# Altium PCB PCB_IP5358.PcbDoc
Units mil, origin at the board's own origin, x right, y up, seen from the top; angles counter-clockwise.
Board outline 3366.14 x 1003.94 mil, 2 copper layers (Top Layer, Bottom Layer); 48 components, 32 nets, 167 pads, 231 vias.
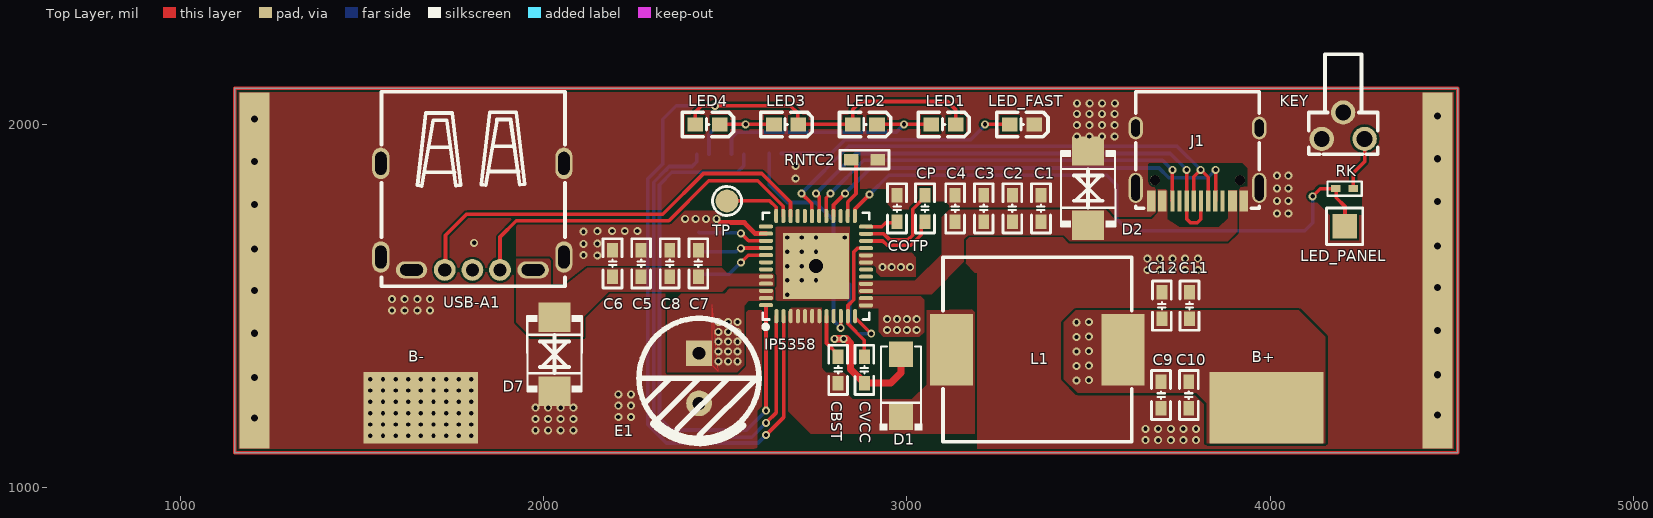
[diagram p0: Top Layer view]
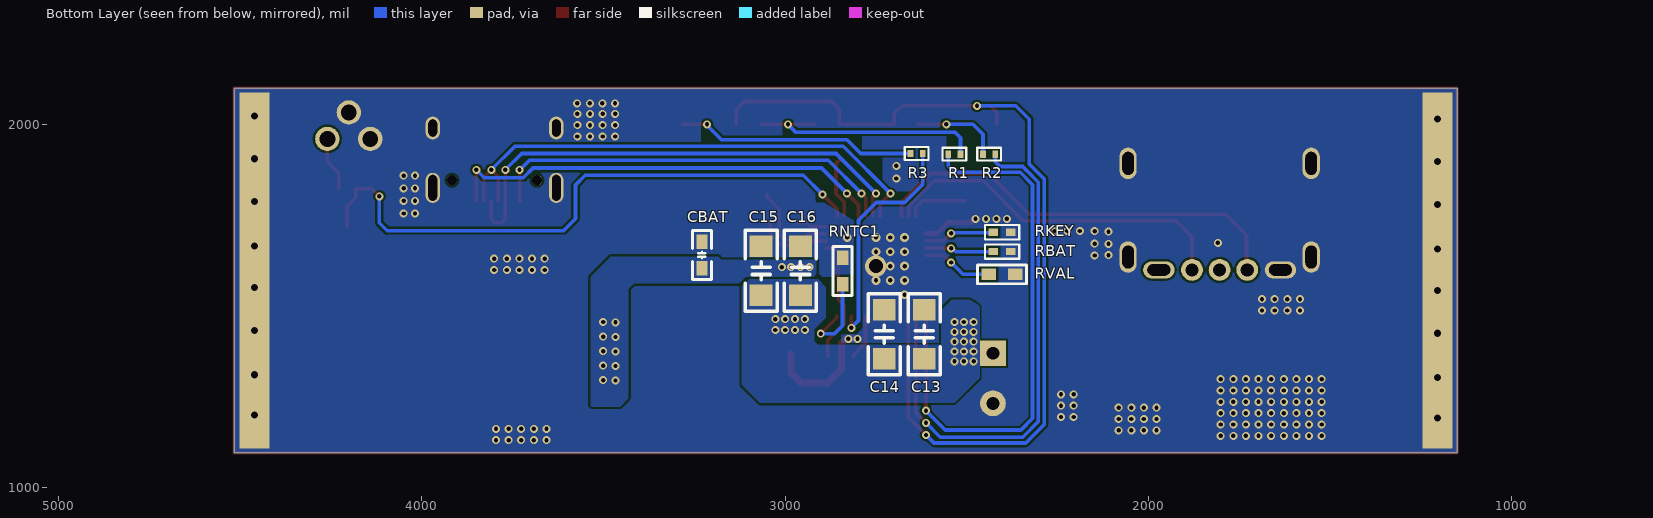
[diagram p1: Bottom Layer view, seen from below]
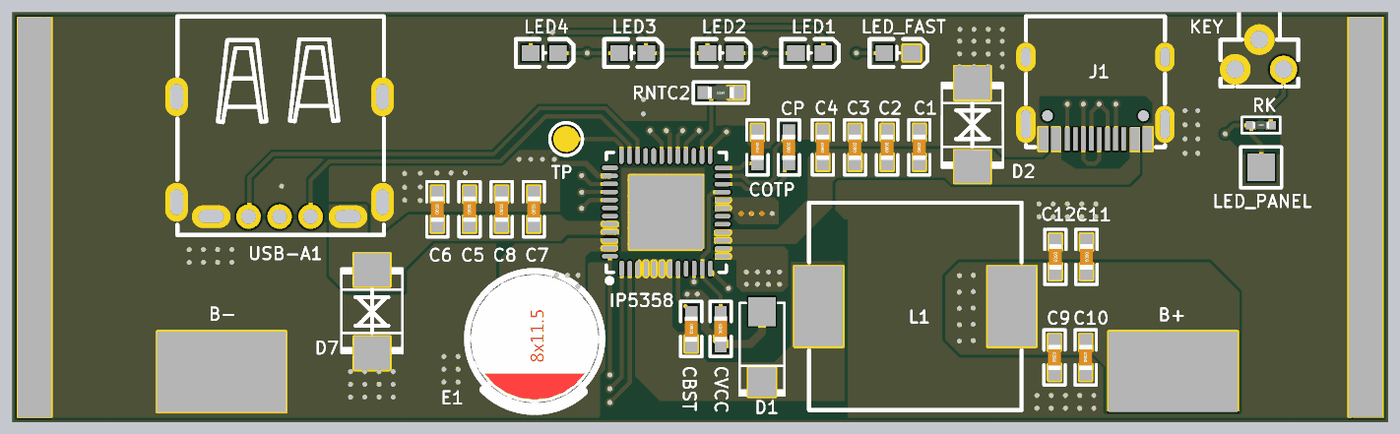
[diagram p2: 3D render of the assembled board from above, using the file's embedded part models]
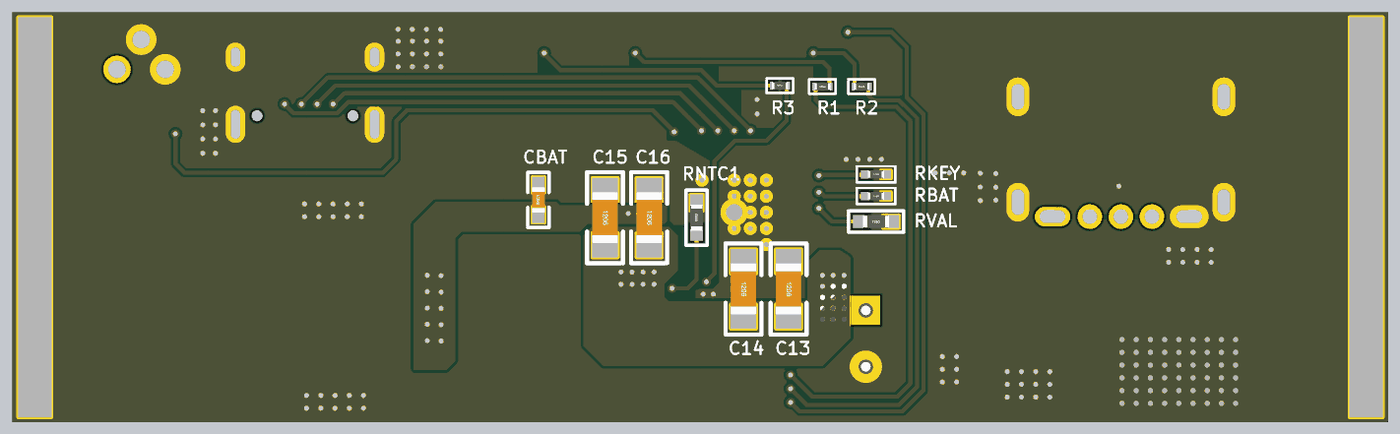
[diagram p3: 3D render of the assembled board from below, using the file's embedded part models]

## Layer stack, top to bottom
Top Solder: solder mask 0.4, Solder Resist, Dk 3.5
Top Layer: signal copper 1.4
Dielectric 1: dielectric 12.6, FR-4, Dk 4.8
Bottom Layer: signal copper 1.4
Bottom Solder: solder mask 0.4, Solder Resist, Dk 3.5

## Board outline
1150,1096.06 4516.14,1096.06 4516.14,2100 1150,2100

## Design rules (kind name [scope] priority, off if disabled: settings)
Clearance [All] p1: gap=6 ignorepadtopadclearanceinfootprint=TRUE except(0: Arc-Hole Track-Hole SMDPad-Hole THPad-Hole Via-Hole Fill-Hole Poly-Hole Region-Hole Text-Hole)
HoleSize [All] p1: absolutevalues=TRUE maxlimit=100 minlimit=12 maxpercent=80.000 minpercent=20.000
HoleToHoleClearance [All] p1: gap=0 allowstackedmicrovias=TRUE
MinimumSolderMaskSliver [All] p1: minsoldermaskwidth=0
PolygonConnect [All] p1: connectstyle=Direct reliefconductorwidth=10 reliefentries=4 polygonreliefangle="90 Angle" airgapwidth=10
RoutingVias [All] p1: holewidth=12 width=20 viastyle="Through Hole" minholewidth=12 minwidth=20 maxholewidth=50 maxwidth=100
SilkToSilkClearance [All] p1: silktosilkclearance=0
SilkToSolderMaskClearance [IsPad] p1: minsilkscreentomaskgap=0 clearancetoexposedcopper=TRUE
SolderMaskExpansion [All] p1: expansion=4
Width [All] p1: maxlimit=300 minlimit=6 preferedwidth=10 minimp=50.000000 maximp=50.000000 favimp=50.000000
25 further rules are at their usual default settings.

## Components (designator, comment, footprint, x,y, rotation, side; value= is the part's Value field where it differs from the comment)
B+ "POWER_PAD" POWER_PAD 3990,1220 r180 top
B- "POWER_PAD" POWER_PAD 1662.16,1220 r180 top
C1 "10uF" C0603_M 3369,1769.13 r90 top
C2 "10uF" C0603_M 3290.33,1769.13 r90 top
C3 "10uF" C0603_M 3211.67,1769.13 r90 top
C4 "10uF" C0603_M 3133,1769.13 r90 top
C5 "10uF" C0603_M 2268.67,1617.7 r90 top
C6 "10uF" C0603_M 2190,1617.7 r90 top
C7 "10uF" C0603_M 2426,1617.7 r90 top
C8 "10uF" C0603_M 2347.33,1617.7 r90 top
C9 "22uF" C0603_M 3699.87,1255 r90 top
C10 "22uF" C0603_M 3776,1255 r90 top
C11 "22uF" C0603_M 3778,1501 r270 top
C12 "22uF" C0603_M 3701.87,1501 r270 top
C13 "22uF" C1206_M 2617,1422.5 r270 bottom
C14 "22uF" C1206_M 2727.35,1422.5 r270 bottom
C15 "22uF" C1206_M 3066,1597 r270 bottom
C16 "22uF" C1206_M 2958,1597 r270 bottom
CBAT "100nF/50V" C0603_M 3229,1640.5 r90 bottom
CBST "100nF/50V" C0603_M 2811,1324.5 r270 top
COTP "2.2uF/16V" C0603_M 2973,1769.13 r270 top
CP "100nF/50V" C0603_M 3050,1769.13 r90 top
CVCC "2.2uF/16V" C0603_M 2883,1324.5 r90 top
D1 "SS34" SS34-SMA 2984,1281.01 r90 top
D2 "SMBJ18CA" TVS 3499,1821.84 r270 top
D7 "SMBJ18CA" TVS 2030,1370 r90 top
E1 "220uF" "CT 3.5*8*11.5 - R" 2428,1301.1 r90 top
IP5358 "IP5358" IP5358 2750,1610 r0 top
J1 "TYPEC-304-BCP16" TYPE-C-16P 3800.43,1939.7 r180 top
KEY "TC-1109DE-C-G" SWITCH 4200.94,1996.42 r180 top
L1 "2.2uH" 2.2uH 3359.22,1380 r0 top
LED1 "25%" 0603LED 3097.12,1999.95 r180 top
LED2 "50%" 0603LED 2880.73,1999.95 r180 top
LED3 "75%" 0603LED 2664.35,1999.95 r180 top
LED4 "100%" 0603LED 2447.96,1999.95 r180 top
LED_FAST "LED_GREEN" 0603LED 3313.5,1999.95 r180 top
LED_PANEL "PZ254V-11-01P" LED 4205,1720 r90 top
R1 "100" R0402_L 2534,1918 r180 bottom
R2 "100" R0402_L 2438.57,1918 r0 bottom
R3 "100" R0402_L 2638.27,1920 r0 bottom
RBAT "1K" R0402_M 2403,1650 r0 bottom
RK "10K" R0402_M 4205,1823.52 r180 top
RKEY "10K" R0402_M 2403,1703 r0 bottom
RNTC1 "51K" R0603_M 2842,1597 r90 bottom
RNTC2 "51K" R0603_M 2883.5,1903 r180 top
RVAL "100K" R0603_M 2403,1587.5 r0 bottom
TP "TEST" "TEST 1.6" 2505,1789.39 r0 top
USB-A1 "U234-051N-3GRA035-5" USB-A-5P 1802.48,1799.51 r180 top

## Footprints (in the part's own frame and the unit in brackets; to place one, negate y for a bottom-side part, rotate by r counter-clockwise, add the part's x,y. Pads: shape width x height; smd on the part's side, far side on the other; paste and mask are expansions set on the pad)
2.2uH [mm] "SMD"
  rect 3x5 smd: 1(-6,0) 2(6,0)
  silkscreen extent -6.6,-6.45 6.6,6.45
0603LED [mil] "0603LED"
  rect 43x39 smd: 1(30,0) 2(-37,0)
  silkscreen extent -75,-34 66,34
C0603_M [mil] "贴片MLCC电容"
  rect 40x30 smd: 1(-36.5,0) 2(36.5,0)
  silkscreen extent -68,-26 68,26, body extent -31,-16 32,16, height 33
C1206_M [mil] "贴片MLCC电容      联系卖家 免费查找封装"
  rect 60x62.99 smd: 1(-67.5,0) 2(67.5,0)
  silkscreen extent -112,-44 112,44, body extent -63,-32 63,32, height 49
"CT 3.5*8*11.5 - R" [mm] "脚距3.5mm , 直径8mm , 高11.5mm"
  rect 1.8x1.8 hole 0.9: 1(1.75,0)
  round 1.8 hole 0.9: 2(-1.75,0)
  silkscreen extent -4.5,-4.2 4.2,4.2, body extent -4,-4 4,4, height 11.55
IP5358 [mm] "IP5358"
  oval 0.28x1 smd: 1(-2.769,-3.5) 2(-2.268,-3.5) 3(-1.768,-3.5) 4(-1.267,-3.5) 5(-0.767,-3.5) 6(-0.267,-3.5) 7(0.231,-3.5) 8(0.732,-3.5) 9(1.232,-3.5) 10(1.732,-3.5) 11(2.233,-3.5) 12(2.733,-3.5) 25(2.718,3.5) 26(2.217,3.5) 27(1.717,3.5) 28(1.217,3.5) 29(0.716,3.5) 30(0.216,3.5) 31(-0.282,3.5) 32(-0.782,3.5) 33(-1.283,3.5) 34(-1.783,3.5) 35(-2.283,3.5) 36(-2.784,3.5)
  oval 1x0.28 smd: 13(3.5,-2.743) 14(3.5,-2.243) 15(3.5,-1.742) 16(3.5,-1.242) 17(3.5,-0.742) 18(3.5,-0.241) 19(3.5,0.257) 20(3.5,0.757) 21(3.5,1.257) 22(3.5,1.758) 23(3.5,2.258) 24(3.5,2.759) 37(-3.5,2.769) 38(-3.5,2.268) 39(-3.5,1.768) 40(-3.5,1.268) 41(-3.5,0.767) 42(-3.5,0.267) 43(-3.5,-0.231) 44(-3.5,-0.731) 45(-3.5,-1.232) 46(-3.5,-1.732) 47(-3.5,-2.232) 48(-3.5,-2.733)
  rect 4.6x4.6 smd: 49(0,0)
  silkscreen extent -3.72,-4.4 3.72,3.73
LED [mm]
  rect 1.7x1.7 smd: 1(0,0)
  silkscreen extent -1.27,-1.27 1.27,1.27
POWER_PAD [mm] "POWER_PAD"
  rect 8x5 smd: 1(0,0)
R0402_L [mm] "1/16W贴片电阻"
  rect 0.4x0.5 smd: 1(-0.425,0) 2(0.425,0)
  silkscreen extent -0.82,-0.45 0.83,0.45, body extent -0.5,-0.25 0.5,0.25, height 0.3
R0402_M [mil] "1/16W贴片电阻"
  rect 26x20 smd: 1(-24,0) 2(24,0)
  silkscreen extent -47,-20 47,20, body extent -20,-10 20,10, height 12
R0603_M [mil] "1/10W贴片电阻"
  rect 40x31.5 smd: 1(-36.5,0) 2(36.5,0)
  silkscreen extent -68,-26 68,26, body extent -31,-16 31,16, height 16
SS34-SMA [mm] "SMA"
  rect 1.8x1.7 smd: 1(-2.192,0) 2(2.192,0)
  silkscreen extent -3.11,-1.48 2.73,1.48
SWITCH [mm]
  round 1.7 hole 1.1: 1(-1.5,0.925) 2(1.5,0.925) 3(0,-0.925)
  silkscreen extent -2.41,-4.99 2.41,2
"TEST 1.6" [mm] "测试点1.6mm"
  round 1.6 smd paste-1.6: 1(0,0)
  silkscreen extent -1.01,-1.02 1.02,1.02
TVS [mil] "SMB(DO-214AA)"
  rect 80.61x88.23 smd: 1(-104.69,0) 2(99.34,0)
  silkscreen extent -108,-75 105,75
TYPE-C-16P [mm] "TYPE-C-16P"
  oval 1x2.099 hole 0.6 slot 1.8 at 90 deg: 13(-4.307,2.903) 14(4.333,2.903)
  oval 1x1.599 hole 0.6 slot 1.2 at 90 deg: 15(-4.307,-1.277) 16(4.333,-1.277)
  rect 0.6x1.45 smd: A1B12(-3.212,3.817) A4B9(-2.437,3.817) B1A12(3.233,3.817) B4A9(2.463,3.817)
  rect 0.3x1.45 smd: A5(-1.238,3.818) A6(-0.237,3.817) A7(0.263,3.817) A8(1.263,3.817) B5(1.763,3.817) B6(0.763,3.817) B7(-0.737,3.817) B8(-1.737,3.817)
  round 0.7 hole 0.7 unplated: ""(-2.967,2.372) ""(2.993,2.372)
  silkscreen extent -4.3,-3.81 4.33,4.32
USB-A-5P [mm] "USB-A-5PIN大电流"
  oval 2.2x1.2 hole 0.8 slot 1.6 at 0 deg: 1(-4.289,5.08) 5(4.211,5.08)
  round 1.524 hole 0.914: 2(-1.969,5.08) 3(-0.039,5.08) 4(1.891,5.08)
  oval 1.2x2.2 hole 0.8 slot 1.6 at 90 deg: 6(-6.439,4.18) 7(6.361,4.18) 8(-6.439,-2.37) 9(6.361,-2.37)
  silkscreen extent -6.52,-7.37 6.31,6.22

## Part data
C1 C2 C3 C4 C5 C6 C7 C8 CBAT CBST COTP CP CVCC: library part C, "10uF(106) ±10% 25V"
C9 C10 C11 C12: library part C, "22uF/10V"
C13 C14 C15 C16: library part C, "22uF/16V"
D1: library part SS34_C408258, BOM_JLCPCB Part Class="Extended Part", BOM_Manufacturer="SLKORMICRO Elec.", BOM_Manufacturer Part=SS34, BOM_Supplier=LCSC, BOM_Supplier Part=C408258, Contributor=LCSC, spicePre=D, spiceSymbolName=SS34_C408258
D2 D7: library part TVS, "18V"
E1: library part CS, "220uF/25V直插固态电容"
J1: "TYPEC-16P"
KEY: BOM_JLCPCB Part Class="Extended Part", BOM_Manufacturer="XKB Enterprise", BOM_Manufacturer Part=TC-1109DE-C-G, BOM_Supplier=LCSC, BOM_Supplier Part=C400325, Contributor=LCSC, spicePre=S, spiceSymbolName=TC-1109DE-C-G
L1: BOM_Manufacturer=YJYCOIN, BOM_Manufacturer Part=YSPI0740-2R2M, BOM_Supplier=LCSC, BOM_Supplier Part=C718393, Contributor=LCSC, nameAlias=Inductance, spicePre=L, spiceSymbolName=YSPI0740-2R2M
LED1 LED2 LED3 LED4: library part LED, "WHITE", LatestRevisionDate=17-Jul-2002, LatestRevisionNote="Re-released for DXP Platform.", PackageDescription="SM LED; 2 Flat Leads", PackageReference=3.2X1.6X1.1, PackageVersion=Feb-2002, Published=8-Jun-2000, Publisher="Altium Limited"
LED_FAST: library part LED, "GREEN", LatestRevisionDate=17-Jul-2002, LatestRevisionNote="Re-released for DXP Platform.", PackageDescription="SM LED; 2 Flat Leads", PackageReference=3.2X1.6X1.1, PackageVersion=Feb-2002, Published=8-Jun-2000, Publisher="Altium Limited"
LED_PANEL: BOM_Manufacturer=XFCN, JLCPCB Part Class="Extended Part", BOM_Manufacturer Part=PZ254V-11-01P, BOM_Supplier=LCSC, BOM_Supplier Part=C492400, Contributor=LCSC, spicePre=H, spiceSymbolName=PZ254V-11-01P
R1 R2 R3 RBAT RK RKEY RNTC1 RNTC2 RVAL: library part R, "贴片电阻"
TP: "测试点"
USB-A1: library part USB-A-5P, BOM_JLCPCB Part Class="Extended Part", BOM_Manufacturer="XKB Enterprise", BOM_Manufacturer Part=U234-051N-3GRA035-5, BOM_Supplier=LCSC, BOM_Supplier Part=C381138, Contributor=LCSC, spicePre=U, spiceSymbolName=U234-051N-3GRA035-5
IP5358: Contributor=Qmery2020_LoveWaiterSeries, spicePre=U, spiceSymbolName=IP5358

## Free pads (board coordinates)
  rect 82x980 smd: 50(1204,1598) 50(4461,1598)
  rect 82x980 smd far side: 50(1204,1598) 50(4461,1598)

## Via types
v1: diameter 22, hole 12, Top Layer to Bottom Layer, tented both sides, 201 vias
v2: diameter 59.06, hole 19.69, Top Layer to Bottom Layer, 16 vias
v3: diameter 24, hole 12, Top Layer to Bottom Layer, 13 vias
v4: diameter 59.06, hole 39.37, Top Layer to Bottom Layer, 1 vias

## Nets (pads, with @x,y where several pads share a name; then routed paths per layer and width w, separated by ;. In a path a pad name is that pad's centre, name@x,y a point inside that pad or via, vN(x,y) a via of type N, cw(c..) or ccw(c..) an arc to the next point about the centre after c; other vN are vias at no path point)
C_IN: C1.1 C2.1 C3.1 C4.1 D2.2 IP5358.15 IP5358.16 J1.A4B9 J1.B4A9
CC1: IP5358.28 J1.A5 | length 1230.7
  Top Layer w10: IP5358.28 2798.1,1748 2798.1,1778.1 v1(2830,1810) ; J1.A5 3850,1790.21 v1(3850,1875)
  Bottom Layer w10: v1(2830,1810) 2900,1880 3694,1880 3721,1853 3828,1853 v1(3850,1875)
CC2: IP5358.29 J1.B5 | length 1144
  Top Layer w10: IP5358.29 2778.2,1798.2 v1(2790,1810) ; J1.B5@3730,1790.43 J1.B5 v1(3731.03,1875)
  Bottom Layer w10: v1(2790,1810) 2881.43,1901.43 3703.46,1901.43 3729.9,1875 v1(3731.03,1875)
DMC: IP5358.31 J1.A7 J1.B7 | length 1441.3
  Top Layer w10: v1(2710,1810) 2738.7,1781.3 2738.7,1748 IP5358.31 ; J1.A7 3790.08,1856.22 v1(3808.86,1875) 3829.45,1854.41 J1.B7
  Bottom Layer w10: v1(2710,1810) 2840,1940 3743.86,1940 v1(3808.86,1875)
DPC: IP5358.30 J1.A6 J1.B6 | length 1383.5
  Top Layer w10: v1(2750,1810) 2758.5,1801.5 IP5358.30 ; v1(3770.39,1875) J1.B6 3770.39,1739.61 3780.86,1729.14 3799.14,1729.14 3808.86,1738.86 3808.86,1788.51 J1.A6
  Bottom Layer w10: v1(2750,1810) 2860,1920 3725.39,1920 v1(3770.39,1875)
FAST: IP5358.10 R3.1 | length 639.4
  Top Layer w10: v1(2818,1440) 2818,1472.01 IP5358.10
  Bottom Layer w10: R3.1 2621.54,1834.46 2671,1785 2749,1785 2798,1736 2798,1460 v1(2818,1440)
GND: B-.1 C1.2 C2.2 C3.2 C4.2 C5.2 C6.2 C7.2 C8.2 C9.1 C10.1 C11.1 C12.1 C13.1 C14.1 C15.1 C16.1 CBAT.2 COTP.1 CVCC.1 D1.2 D2.1 D7.1 E1.2 IP5358.38 IP5358.49 J1.13 J1.14 J1.15 J1.16 J1.A1B12 J1.B1A12 KEY.2 KEY.3 LED_FAST.2 pad.50 RBAT.1 RKEY.1 RNTC1.2 RNTC2.1 RVAL.1 USB-A1.5 USB-A1.6 USB-A1.7 USB-A1.8 USB-A1.9 | length 491.3
  Top Layer w10: CVCC.1@2881,1290 CVCC.1
  Top Layer w14: v1(2476,1739.86) 2486.36,1729.5 2552.59,1729.5 2582.79,1699.31 IP5358.38
  Top Layer w20: v1(2801,1410) v1(2826,1410) 2833,1410 2845,1398 2845,1326 CVCC.1@2881,1290 ; CVCC.1 2955.37,1288 2984,1316.63 D1.2
  other v1: 3657,1130.8 3691.75,1130.8 3726.5,1130.8 3761.25,1130.8 3796,1130.8 1523.25,1142.6 1558,1142.6 1592.75,1142.6 1627.5,1142.6 1662.25,1142.6 1697,1142.6 1731.75,1142.6 1766.5,1142.6 1801.25,1142.6 1977.75,1157.8 2012.5,1157.8 2047.25,1157.8 2082,1157.8 3657,1162 3691.75,1162 3726.5,1162 3761.25,1162 3796,1162 1523.25,1173.8 1558,1173.8 1592.75,1173.8 1627.5,1173.8 1662.25,1173.8 1697,1173.8 1731.75,1173.8 1766.5,1173.8 1801.25,1173.8 1977.75,1189 2012.5,1189 2047.25,1189 2082,1189 2206,1194.6 2240.75,1194.6 1523.25,1205 1558,1205 1592.75,1205 1627.5,1205 1662.25,1205 1697,1205 1731.75,1205 1766.5,1205 1801.25,1205 1977.75,1220.2 2012.5,1220.2 2047.25,1220.2 2082,1220.2 2206,1225.8 2240.75,1225.8 1523.25,1236.2 1558,1236.2 1592.75,1236.2 1627.5,1236.2 1662.25,1236.2 1697,1236.2 1731.75,1236.2 1766.5,1236.2 1801.25,1236.2 2206,1257 2240.75,1257 1523.25,1267.4 1558,1267.4 1592.75,1267.4 1627.5,1267.4 1662.25,1267.4 1697,1267.4 1731.75,1267.4 1766.5,1267.4 1801.25,1267.4 1523.25,1298.6 1558,1298.6 1592.75,1298.6 1627.5,1298.6 1662.25,1298.6 1697,1298.6 1731.75,1298.6 1766.5,1298.6 1801.25,1298.6 1583,1487.8 1617.75,1487.8 1652.5,1487.8 1687.25,1487.8 1583,1519 1617.75,1519 1652.5,1519 1687.25,1519 3662,1599.3 3696.75,1599.3 3731.5,1599.3 3766.25,1599.3 3801,1599.3 3662,1630.5 3696.75,1630.5 3731.5,1630.5 3766.25,1630.5 3801,1630.5 2148,1639 2110,1640 2110,1671.37 2148,1672 1809,1674 2110,1705 2148,1706 2188.75,1706.63 2223.5,1706.63 2258.25,1706.63 2389.75,1739.86 2418.5,1739.86 2447.25,1739.86 4019,1754.74 4050.2,1754.74 4019,1789.49 4050.2,1789.49 4019,1824.24 4050.2,1824.24 2693.99,1851 4019,1858.99 4050.2,1858.99 2694,1886 3467.75,1966.57 3502.5,1966.57 3537.25,1966.57 3572,1966.57 3467.75,1997.77 3502.5,1997.77 3537.25,1997.77 3572,1997.77 3467.75,2028.97 3502.5,2028.97 3537.25,2028.97 3572,2028.97 3468.25,2058 3503,2058 3537.75,2058 3572.5,2058
  other v2: 1204,1192.02 4461,1200.02 1204,1303.12 4461,1311.12 1204,1425.17 4461,1433.17 1204,1543.29 4461,1551.29 1204,1657.45 4461,1665.45 1204,1779.51 4461,1787.51 1204,1897.62 4461,1905.62 1204,2015 4461,2023
  other v3: 2671.26,1531.27 2671.26,1570.64 2710.63,1570.64 2750,1570.64 2671.26,1610.01 2710.63,1610.01 2671.26,1649.38 2710.63,1649.38 2750,1649.38 2671.26,1688.75 2710.63,1688.75 2750,1688.75 2828.74,1688.75
  other v4: 2750,1610.01
L1: IP5358.48 R1.1 | length 1547.2
  Top Layer w10: v1(2612.2,1212) IP5358.48
  Bottom Layer w10: R1.1 2550.73,1885.73 2533,1868 2353,1868 2319,1834 2319,1191 2351,1159 2559.2,1159 v1(2612.2,1212)
L2: IP5358.1 R2.1 | length 1471.1
  Top Layer w10: v1(2612.2,1178.5) 2641,1207.3 IP5358.1
  Bottom Layer w10: R2.1 2421.84,1897 2408.84,1884 2346.37,1884 2335.37,1873 2335,1873 2303,1841 2303,1182 2346,1139 2572.7,1139 v1(2612.2,1178.5)
L3: IP5358.2 LED1.2 LED2.1 LED3.2 LED4.1 | length 2614.6
  Top Layer w10: LED4.1 2417.96,2033.96 2435,2051 v1(2472,2051) 2679,2051 2700.1,2029.9 2700.1,2001.2 LED3.2 LED2.1 2850.73,2041.23 2872.5,2063 3112,2063 3134.12,2040.88 LED1.2 ; v1(2612.2,1145) 2660.7,1193.49 IP5358.2
  Bottom Layer w10: v1(2472,2051) 2365,2051 2328,2014 2328,1891 2287,1850 2287,1174 2338,1123 2590.2,1123 v1(2612.2,1145)
NetCBST_1: CBST.1 IP5358.8 | length 124.5
  Top Layer w10: IP5358.8 2778.8,1398.2 2811,1366 CBST.1
NetCBST_2: CBST.2 D1.1 IP5358.3 IP5358.4 IP5358.5 IP5358.6 IP5358.7 L1.1
NetCOTP_2: COTP.2 IP5358.24 | length 91
  Top Layer w10: IP5358.24 2931.11,1718.61 2942,1729.5 2969.87,1729.5 COTP.2
NetCP_1: CP.1 IP5358.22 | length 209.8
  Top Layer w10: IP5358.22 2933.47,1679.21 2945.68,1667 3010.63,1667 3040,1696.37 3040,1722.63 CP.1
NetCP_2: CP.2 IP5358.23 | length 264.8
  Top Layer w10: IP5358.23 2887.99,1699.1 2922.44,1699.1 2922.65,1699.31 2936,1699.31 2952.31,1683 3004,1683 3016,1695 3016,1766.63 3050,1800.63 CP.2
NetIP5358_12: IP5358.12 RNTC1.1 | length 250.2
  Top Layer w10: IP5358.12 2857.8,1472.02 2857.8,1468.2 v1(2902,1424)
  Bottom Layer w10: RNTC1.1 2842,1446 2864,1424 v1(2902,1424)
NetIP5358_25: IP5358.25 LED_PANEL.1 RK.2 | length 1704.6
  Top Layer w10: IP5358.25 2857,1767 v1(2897,1807) ; v1(4117,1802) 4117.09,1802 4138,1822.91 4181.61,1822.91 4181.61,1798.52 4206,1774.13 4206,1721 LED_PANEL.1
  Bottom Layer w10: v1(2897,1807) 2950,1860 3550.36,1860 3577,1833.36 3577,1740 3610,1707 4095,1707 4117,1729 v1(4117,1802)
NetIP5358_26: IP5358.26 RNTC2.2 | length 171.5
  Top Layer w10: IP5358.26 2837.5,1748 2837.3,1748.19 2837.3,1786.19 2860,1808.89 2860,1892.25 2849.25,1903 RNTC2.2
NetIP5358_36: IP5358.36 TP.1 | length 166.7
  Top Layer w10: TP.1 2622.81,1789.39 2640.4,1771.81 IP5358.36
NetIP5358_39: IP5358.39 RKEY.2 | length 193.9
  Top Layer w10: v1@2544,1700 2564.39,1679.61 IP5358.39
  Bottom Layer w10: RKEY.2 2428.5,1701.5 2541.5,1701.5 v1(2543,1700)
NetIP5358_40: IP5358.40 RBAT.2 | length 188.6
  Top Layer w10: v1@2545,1659 2545.91,1659.91 IP5358.40
  Bottom Layer w10: RBAT.2@2426,1649.21 2529.96,1649.21 2539.75,1659 v1(2543,1659)
NetIP5358_41: IP5358.41 RVAL.2 | length 194.5
  Top Layer w10: v1(2543,1620) 2563.21,1640.21 IP5358.41
  Bottom Layer w10: RVAL.2 2510.5,1587.5 v1(2543,1620)
NetKEY_1: KEY.1 RK.1 | length 149.3
  Top Layer w10: RK.1 4229,1866 4260,1897 KEY.1
NetLED1_1: LED1.1 LED2.2 R1.2 | length 684.6
  Top Layer w10: LED2.2 LED1.1
  Bottom Layer w10: R1.2 2517.27,1963.27 2532,1978 2970,1978 v1(2992,2000)
NetLED3_1: LED3.1 LED4.2 R2.2 | length 320.2
  Top Layer w10: LED4.2 LED3.1
  Bottom Layer w10: R2.2 2455.3,1973.3 2482,2000 v1(2556.47,2000) v1@2556.47,1996.75
NetLED_FAST_1: LED_FAST.1 R3.2 | length 663.1
  Top Layer w10: v1(3215,2000) LED_FAST.1 LED_FAST.1
  Bottom Layer w10: R3.2 2792,1920 2830,1958 3175.47,1958 3215,1997.53 v1(3215,2000)
PW_VCC: CVCC.2 IP5358.11 IP5358.21 | length 351.5
  Top Layer w10: CVCC.2 2883,1406.11 2838.1,1451.02 2838.1,1472.02 IP5358.11 2838.1,1472.41 2838.1,1501.44 2854,1517.35 2854,1649 2864.31,1659.31 2887.6,1659.31 IP5358.21
UA1-DM: IP5358.35 USB-A1.2 | length 990.8
  Top Layer w10: USB-A1.2 1880,1690 1925,1735 2345,1735 2455,1845 2589.83,1845 2659.9,1774.93 2659.9,1748 IP5358.35
UA1-DP: IP5358.34 USB-A1.4 | length 1187.2
  Top Layer w10: USB-A1.4 1730,1601.47 1730,1695 1788,1753 2328,1753 2440,1865 2600.43,1865 2679.8,1785.63 IP5358.34
UA1-OUT: C5.1 C6.1 C7.1 C8.1 D7.2 IP5358.44 IP5358.45 USB-A1.1
VBAT: B+.1 C9.2 C10.2 C11.2 C12.2 CBAT.1 IP5358.19 IP5358.20 L1.2
  other v1: 3467,1295 3501,1296 3467,1335 3501,1336 3467,1375 3501,1376 3467,1415 3501,1416 3467,1455 3501,1456 2933,1607 2958.33,1607 2983.67,1607 3009,1607
VSYS: C13.2 C14.2 C15.2 C16.2 E1.1 IP5358.13 IP5358.14 IP5358.46 IP5358.47
  other v1: 2481,1348 2508,1348 2534,1348 2481,1375 2508,1375 2534,1375 2481,1402 2508,1402 2534,1402 2481,1429 2508,1429 2534,1429 2946,1434 2973,1434 3000,1434 3027,1434 2481,1456 2508,1456 2534,1456 2946,1464 2973,1464 3000,1464 3027,1464
pads on no net: IP5358.9 IP5358.17 IP5358.18 IP5358.27 IP5358.32 IP5358.33 IP5358.37 IP5358.42 IP5358.43 J1. J1.A8 J1.B8 USB-A1.3
copper on no net: | length 8740.2
  Top Layer w10: 1150,1096.06 1150,2100 4516.14,2100 4516.14,1096.06 1150,1096.06

## Polygon pours and split planes (outlines as drawn)
GND on Top Layer "Top Layer-GND" (solid, pour order 76): 1149,2100 1149,1096.06 4515.14,1096.06 4515.14,2100
NetCBST_2 on Top Layer "Top Layer-NetCBST_2" (solid, pour order 30): 2755,1340 2778.37,1316.63 2826.87,1316.63 2837,1306.5 2837,1257 2858,1236 2858,1212 2763,1212 2755,1220
no net on Top Layer "Top Layer-No Net" (solid, pour order 72): 1017,2347
VBAT on Top Layer "Top Layer-VBAT" (solid, pour order 68): 2868,1647 2868,1614 2869,1613 2909,1613 2916,1605.74 2916,1593 2928.19,1580.81 3025,1580.81 3025,1635 3013,1647
C_IN on Top Layer "Top Layer-C_IN" (solid, pour order 24): 3691,1821 3691,1756 3674.61,1739.61 3572.89,1739.61 3547.13,1765.37 3116.37,1765.37 3096,1745 3096,1643 3022,1569 2869,1569 2866,1566 2866,1536 2869,1533 3068,1533 3157,1622 3157,1684 3168.5,1695.5 3431.5,1695.5 3449,1678 3699.5,1678 3717,1695.5 3717,1821 3716,1822
no net on Top Layer "Top Layer-No Net 1" (solid, pour order 56): 2465,1504 2463,1502 2463,1339 2481,1321
no net on Top Layer "Top Layer-No Net 2" (solid, pour order 54): 2461,1492.2
no net on Top Layer "Top Layer-No Net 3" (solid, pour order 52): 2473,1485
no net on Top Layer "Top Layer-No Net 4" (solid, pour order 50): 2468,1470
VSYS on Top Layer "Top Layer-VSYS" (solid, pour order 48): 2871.43,1529 3036,1529 3048,1517 3048,1428.33 3034.67,1415 2935.66,1415 2922,1428.9 2922,1494 2868,1494 2868,1524.76
no net on Top Layer "Top Layer-No Net 5" (solid, pour order 42): 2866.86,1529
no net on Top Layer "Top Layer-No Net 6" (solid, pour order 40): 2869,1526
NetCBST_2 on Top Layer "Top Layer-NetCBST_2 1" (solid, pour order 20): 3054.73,1489 3054.73,1283.87 3013.86,1243 2803.24,1243 2765.53,1280.71 2765.53,1495 2682,1495 2673,1486 2673,1210 2735,1148 3187,1148 3187,1483 3179,1491
VSYS on Top Layer "Top Layer-VSYS 1" (solid, pour order 36): 2510,1547.5 2510.5,1547 2629.5,1547 2633,1543.5 2633,1519 2628,1514 2565,1514 2552,1501 2552,1337 2533,1318 2341,1318 2341,1496 2378.44,1533.44 2498.7,1533.44 2501.25,1536
no net on Top Layer "Top Layer-No Net 7" (solid, pour order 26): 2765,1356.21
VBAT on Top Layer "Top Layer-VBAT 1" (solid, pour order 16): 4152,1123 4152,1415.02 4079.02,1488 3465,1488 3432,1455 3432,1299 3470,1261 3796,1261 3825,1232 3825,1123
no net on Top Layer "Top Layer-No Net 8" (solid, pour order 18): 3061.14,1480
C_IN on Top Layer "Top Layer-C_IN 1" (solid, pour order 12): 3884,1819 3884,1742 3859,1717 3751,1717 3700,1749.45 3700,1678.5 3883.5,1678.5 3909,1704 3909,1819
no net on Top Layer "Top Layer-No Net 9" (solid, pour order 6): 3881,1781
UA1-OUT on Top Layer "Top Layer-UA1-OUT" (solid, pour order 4): 1925,1630 1925,1455 1965,1415 2110,1415 2110,1470 2180,1540 2491.8,1540 2506.8,1555 2635,1555 2635,1585 2630,1590 2505,1590 2490,1605 2120,1605 2055.99,1555 2020,1555 2020,1625 2015,1630
GND on Bottom Layer "Bottom Layer-GND" (solid, pour order 78): 1150,2100 1150,1100 1153.94,1096.06 4516.14,1096.06 4516.14,2100
VSYS on Bottom Layer "Bottom Layer-VSYS" (solid, pour order 58): 2473,1506 2465,1498 2465,1302 2533.11,1233.89 3069.89,1233.89 3119,1283 3119,1554 3099,1574 2910,1574 2887.79,1551.79 2887.79,1468.2 2920.5,1435.5 2920.5,1403.5 2910,1393 2571,1393 2571,1488.93 2541.93,1518 2492,1518
VBAT on Bottom Layer "Bottom Layer-VBAT" (solid, pour order 66): 3139,1563 3127,1563 3108.79,1581.21 2921.04,1581.21 2914,1588.25 2914,1627 3186,1627 3194,1619 3194,1565.24
VBAT on Bottom Layer "Bottom Layer-VBAT 1" (solid, pour order 64): 3533,1223.51 3535,1225.51 3535,1581 3479.94,1636 3184.5,1636 3139.69,1591.19 3139,1584.5 3139,1563 3260,1563 3416,1563 3432,1547 3432,1246 3454.49,1223.51
no net on Bottom Layer "Bottom Layer-No Net" (solid, pour order 60): 2571,1440.97

## Other copper
Top Layer:
  pour cut-out: 2903.63,1823.01 2940.72,1823.01 2947,1816.73 2947,1779.63 2960,1766.63 2929.65,1736.28 2929.65,1725.62 2865.39,1725.62 2868.59,1728.82 2868.59,1766.65 2902.94,1801
  pour cut-out: 1925,1636.49 1925,1718 1892.35,1685.35 1891.22,1685.35 1891.22,1624.66 1881,1614.45 1895.94,1599.51 1916.31,1599.51
  pour cut-out: 1916.31,1710
  pour cut-out: 2637.59,1514.41 2638,1514 2838.1,1514 2838.1,1512.16 2818.94,1493 2776.35,1493 2769.75,1499.59 2677.41,1499.59 2671.82,1494 2635.41,1494 2635.41,1509.97 2634.68,1510.71 2639.49,1515.52 2639.49,1519
  pour cut-out: 2842.78,1649 2842.78,1718.78 2844.36,1720.36 2861.88,1720.36 2861.88,1713.75 2868,1707.63 2868,1664.5 2860.5,1664.5 2854,1658
  pour cut-out: 2639.59,1721.23 2642.21,1718.61 2861.88,1718.61 2861.88,1722.12 2855,1729 2851.33,1725.33 2648.7,1725.33
  pour cut-out: 3054.73,1489 3054.73,1525.99 3054.21,1526.51 3059.19,1531.49 3075.67,1531.49 3161.59,1617.41 3186.88,1592.12 3194,1592.12 3194,1483.51 3193.49,1483 3179,1497.49 3178.9,1497.49
  pour cut-out: 2713,1145 2714.71,1143.29 2714.71,1106 3192.49,1106 3193.49,1105 3193.49,1148
  pour cut-out: 4123.63,1785.99 4130.01,1785.99 4164,1752 4256.13,1752 4252.24,1755.88 4252.24,1843.2 4157.76,1843.2 4156,1841.45 4156,1824.24 4139.24,1824.24 4129.26,1814.26
  pour cut-out: 3662.43,1846.3 3662.43,1890.76 3666.67,1895 3922.88,1895 3939,1878.88 3939,1829 3921.82,1829 3914.42,1821.6 3912.46,1823.56 3683.75,1823.56
  pour cut-out: 3065,1788 3106.13,1788 3116.37,1777.75 3116.37,1765.37 3089.51,1738.51 3089.51,1642.51 3033,1586 3025,1594 3025,1642 3009,1658 3013,1662 3013,1778.1
  pour cut-out: 3076,1787.13
  pour cut-out: 2931.11,1718.61 2933.47,1716.24 2933.47,1679.21 3000.21,1679.21 3016,1695 3016,1766.63 2960,1766.63 2928.19,1734.82 2928.19,1732.63
  pour cut-out: 2648.7,1834 2848,1834 2852.51,1829.49 2852.51,1799 2668,1799 2663,1804
  pour cut-out: 2654.41,1827 2658.4,1823.01 2907,1823.01 2907,1803.93 2851.07,1748 2659.9,1748
  pour cut-out: 2600.99,1224.95 2587.63,1211.59 2587.63,1110.63 2585,1108 2586,1107 2735,1107 2736,1106 2737.74,1107.74 2737.74,1143 2736.35,1143 2643.15,1236.2 2616,1236.2
  pour cut-out: 2557,1485.49 2559.51,1488 2605,1488 2605,1496.88 2591,1510.88 2587.63,1507.51 2560.51,1507.51 2556.47,1503.47
  pour cut-out: 2334.51,1491 2334.51,1538.61 2335.9,1540 2342.39,1533.51 2366.89,1533.51 2371.51,1528.89
  pour cut-out: 2388,1762.65 2388.35,1763 2580,1763 2621,1804 2576.22,1848.78 2436.36,1848.78 2365.75,1778.18 2362.79,1778.18
  pour cut-out: 2490,1611.49 2490,1747.65 2498.99,1756.64 2523.91,1756.64 2523.91,1761.15 2540.94,1778.18 2621.24,1778.18 2639.59,1759.82 2639.59,1589.59 2513.65,1589.59 2500,1603.25
  pour cut-out: 2845,1398 2843.49,1396.49 2843.49,1259.69 2853.69,1249.49 3011.17,1249.49 3048.24,1286.56 3048.24,1414.76 3041.33,1421.67 3032.17,1412.5 2939.66,1412.5 2935.66,1408.51 2926.45,1417.72 2905.1,1417.72 2889.7,1402.32 2871.39,1402.32
Bottom Layer:
  pour cut-out: 3231.01,1993.37 3231.01,1946.01 3229.11,1944.11 3182,1944.11 3182,1958.04 3170.83,1969.22
  pour cut-out: 3009.33,2000 3007,1997.67 3007,1963.27 2972,1963.27 2970,1965.27 2970,1978
  pour cut-out: 2787.35,1931.22 2787.35,1971.35 2789,1973 2824,1973 2824,1956 2805,1937
  pour cut-out: 2420,1929 2418,1927 2418,1870 2535,1870 2556.47,1891.47 2556.47,1996.75 2485.25,1996.75 2482,2000 2457,1975 2457,1928
  pour cut-out: 2732,1909 2732,1845 2793,1906 2796,1906 2796,1908 2793,1911
  pour cut-out: 2648.8,1816.63 2693.99,1816.63 2693.99,1799.76 2699,1794.74 2698.26,1794 2671.43,1794
  pour cut-out: 2809.22,1736 2809.22,1774.22 2820.63,1785.63 2912.38,1785.63 2916,1789.25 2916,1842 2951,1877 2816,1877 2816,1856 2753,1793
  pour cut-out: 2805.93,1743.93
  pour cut-out: 2808.36,1740.29
  pour cut-out: 2805.93,1743.93
  pour cut-out: 2808.36,1740.29 2808.36,1785.37 2811.5,1788.51 2915.25,1788.51 2915.25,1807.07 2914.09,1808.23
  pour cut-out: 2809.22,1736 2867.96,1794.74 2909.26,1794.74
  pour cut-out: 2827.67,1586.21 2806.01,1586.21 2806.01,1467.85 2815.94,1457.92 2830.78,1457.92 2830.78,1583.78 2831,1584
  pour cut-out: 2906.82,1442.18 2895.63,1431 2865,1431 2848,1448 2850.73,1450.73 2850.73,1537.81 2858.81,1537.81 2868,1547 2868,1579 2898.26,1579 2907.51,1588.25 2909.26,1586.5 2909.26,1573.26 2887.79,1551.79 2887.79,1459.02 2900.65,1446.16
  pour cut-out: 2845,1398 2845,1420.5 2838.5,1420.5 2836,1423 2835.67,1422.67 2802.69,1422.67 2786.78,1438.57 2786.78,1458.19 2811.57,1433.41 2841.49,1433.41 2846,1428.9
  pour cut-out: 1690,1633.01